# EAGLE board BR86_MKL_33961_Lichtplatine_hinten_V1 (EAGLE 5.10)
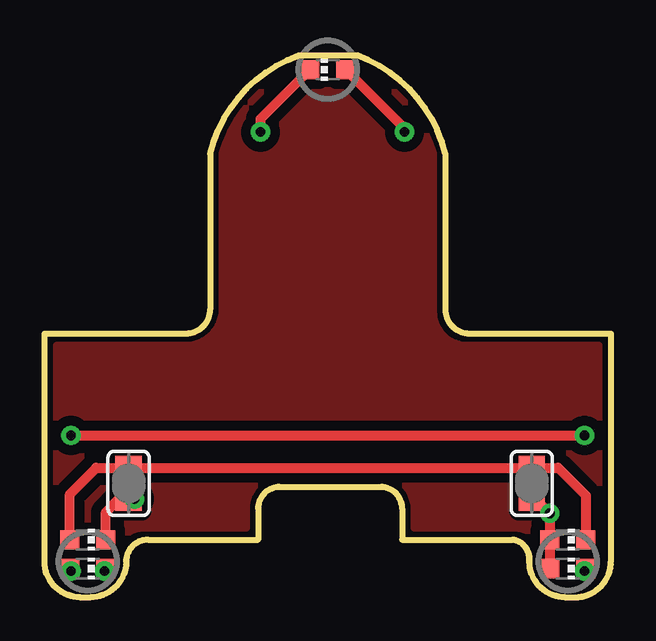
[diagram p0: board, top side]
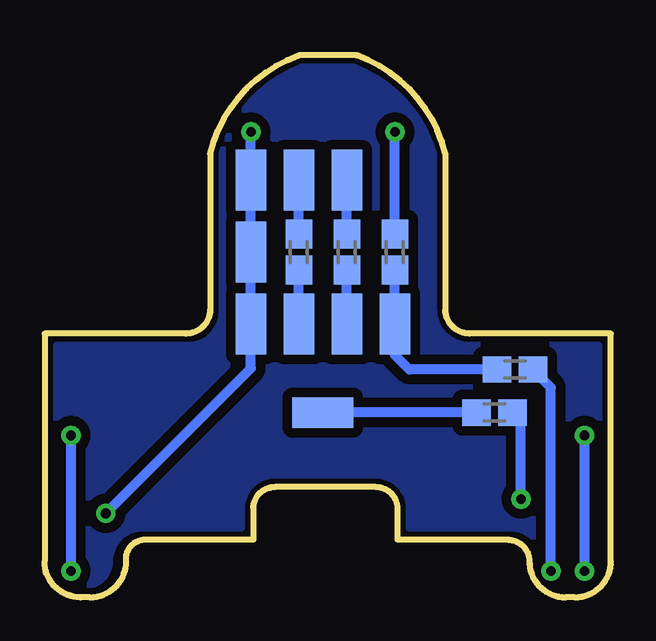
[diagram p1: board, bottom side, seen from below]

No outline drawn. Coordinates in mm, seen from the top.
Copper layers (1*16): Top 0.035mm / dielectric 1.5mm / Bottom 0.035mm
Design rules "default *": minimum track width 7mil, minimum drill 0.4mm, track to track 8mil, track to pad 8mil, pad to pad 8mil, via to via 8mil, smd to smd 8mil, copper to edge 40mil, drill to drill 8mil, minimum pad ring 10mil, minimum via ring 8mil, stop-mask expansion 4mil, vias tented up to drill 0mil, thermal gap 10mil
Milling: 26 lines

## Footprints (pad centres in the part's own frame; a part is rotated, then mirrored left to right if it is on the bottom)
CHIP-LED0603 = smd 0.8 x 0.8: A 0,-0.75; C 0,0.75
SMD1,27-2,54 = smd 1.27 x 2.54: 1 0,0
R0603S = smd 1.2 x 1.1: 1 -0.75,0; 2 0.75,0
SJS = smd 1 x 1.1: 1 -0.65,0; 2 0.65,0

## Placement (x,y rotation side)
AB1  [CHIP-LED0603]  1.8,1.2 270 top
AB2  [CHIP-LED0603]  21.8,1.2 270 top
AB3  [CHIP-LED0603]  11.8,22 90 top
F1  [SMD1,27-2,54]  13,11.4 180 bottom
F2  [SMD1,27-2,54]  13,17.4 180 bottom
FW1  [SMD1,27-2,54]  11,11.4 180 bottom
FW2  [SMD1,27-2,54]  11,17.4 180 bottom
HI  [SMD1,27-2,54]  12,7.7 90 bottom
PLUS1  [SMD1,27-2,54]  15,17.4 180 bottom
PLUS2  [SMD1,27-2,54]  15,14.4 0 bottom
PLUS3  [SMD1,27-2,54]  15,11.4 180 bottom
R1  1k7  [R0603S]  4,9.5 180 bottom
R2  10k  [R0603S]  4.85,7.7 180 bottom
R3  [R0603S]  13,14.4 90 bottom
R4  [R0603S]  11,14.4 90 bottom
R5  [R0603S]  9,14.4 270 bottom
RU1  [CHIP-LED0603]  1.8,2.4 270 top
RU2  [CHIP-LED0603]  21.8,2.4 270 top
SJ1  [SJS]  20.3,4.75 90 top
SJ2  [SJS]  3.5,4.75 270 top
VO  [SMD1,27-2,54]  9,11.4 180 bottom

## Library data of the parts
AB1-AB3 RU1 RU2 = led
F1 F2 FW1 FW2 HI PLUS1-PLUS3 VO = wirepad
R1-R5 = rcl
SJ1 SJ2 = jumper

## Nets
N$1: AB1.A AB2.C
N$2: R1.2 R5.2 VO.1
N$3: RU1.A RU2.C SJ1.2 SJ2.1
N$4: AB3.C R5.1
N$5: AB1.C R1.1
N$6: HI.1 R2.2
N$8: F1.1 R3.1
N$9: FW1.1 R4.1
N$10: AB2.A AB3.A PLUS1.1 PLUS2.1 PLUS3.1 RU2.A SJ1.1
N$11: F2.1 R3.2
N$12: FW2.1 R4.2
N$13: R2.1 RU1.C SJ2.2

## Tracks (layer width: path | path; a pad name or v marks a point on that pad's centre or on a via)
N$1  (via drill 0.4)
  Top 0.406: AB2.C 22.55,1.1 v22.5,1.1 | v1.1,6.75 v22.5,6.75 | AB1.A 1.05,1.15 v1.1,1.1
  Bottom 0.406: v22.5,6.75 v22.5,1.1 | v1.1,1.1 v1.1,6.75
N$2
  Bottom 0.406: R5.2 VO.1 9,10.1 8.4,9.5 R1.2
N$3
  Top 0.406: RU2.C 22.55,4.25 21.4,5.4 SJ1.2 SJ2.1 2.15,5.4 1.05,4.3 RU1.A
N$4  (via drill 0.4)
  Top 0.406: AB3.C 9,19.95 v9,19.4
  Bottom 0.406: R5.1 v9,19.4
N$5  (via drill 0.4)
  Top 0.406: v2.5,1.1 2.5,1.15 AB1.C
  Bottom 0.406: v2.5,1.1 2.5,8.75 R1.1
N$6
  Bottom 0.406: R2.2 HI.1
N$7
  pour Bottom (isolate 0.406): 10.7,22.1 arc53 7.4,18.5 7.4,12 arc-90 5.9,10.5 0.5,10.5 0.5,1.5 arc90 1.5,0.5 1.8,0.5 arc90 2.8,1.5 arc-90 4.2,2.9 8.4,2.9 8.4,3.7 arc-90 9.8,5.1 14,5.1 arc-90 15.4,3.7 15.4,2.9 19.5,2.9 arc-90 20.9,1.5 arc90 21.9,0.5 22.1,0.5 arc90 23.1,1.5 23.1,10.5 17.6,10.5 arc-90 16.2,11.9 16.2,18.5 arc53 12.9,22.1
  pour Top (isolate 0.406): 10.7,22.1 arc53 7.4,18.5 7.4,12 arc-90 5.9,10.5 0.5,10.5 0.5,1.5 arc90 1.5,0.5 1.8,0.5 arc90 2.8,1.5 arc-90 4.2,2.9 8.4,2.9 8.4,3.7 arc-90 9.8,5.1 14,5.1 arc-90 15.4,3.7 15.4,2.9 19.5,2.9 arc-90 20.9,1.5 arc90 21.9,0.5 22.1,0.5 arc90 23.1,1.5 23.1,10.5 17.6,10.5 arc-90 16.2,11.9 16.2,18.5 arc53 12.9,22.1
N$8
  Bottom 0.406: F1.1 R3.1
N$9
  Bottom 0.406: FW1.1 R4.1
N$10  (via drill 0.4)
  Top 0.254: AB2.A 21.2,1.04 21.25,1.04
  Top 0.406: AB2.A RU2.A v21.05,3.5 20.45,4.1 SJ1.1 | AB3.A 15,19.55 v15,19.4
  Bottom 0.406: v15,19.4 PLUS1.1 PLUS2.1 PLUS3.1 15,9.55 v21.05,3.5
N$11
  Bottom 0.406: R3.2 F2.1
N$12
  Bottom 0.406: R4.2 FW2.1
N$13  (via drill 0.4)
  Top 0.406: RU1.C 2.55,3.55 3.1,4.1 SJ2.2 v3.75,4.1
  Bottom 0.406: v3.75,4.1 3.75,7.35 R2.1

## Text on the board
tStop: BR86 LED | Für Märklin 33961 | design by Janik Merz
bStop: BR86 LED | + | w | r